# EAGLE board ADC (EAGLE 6.2), part 1 of 2
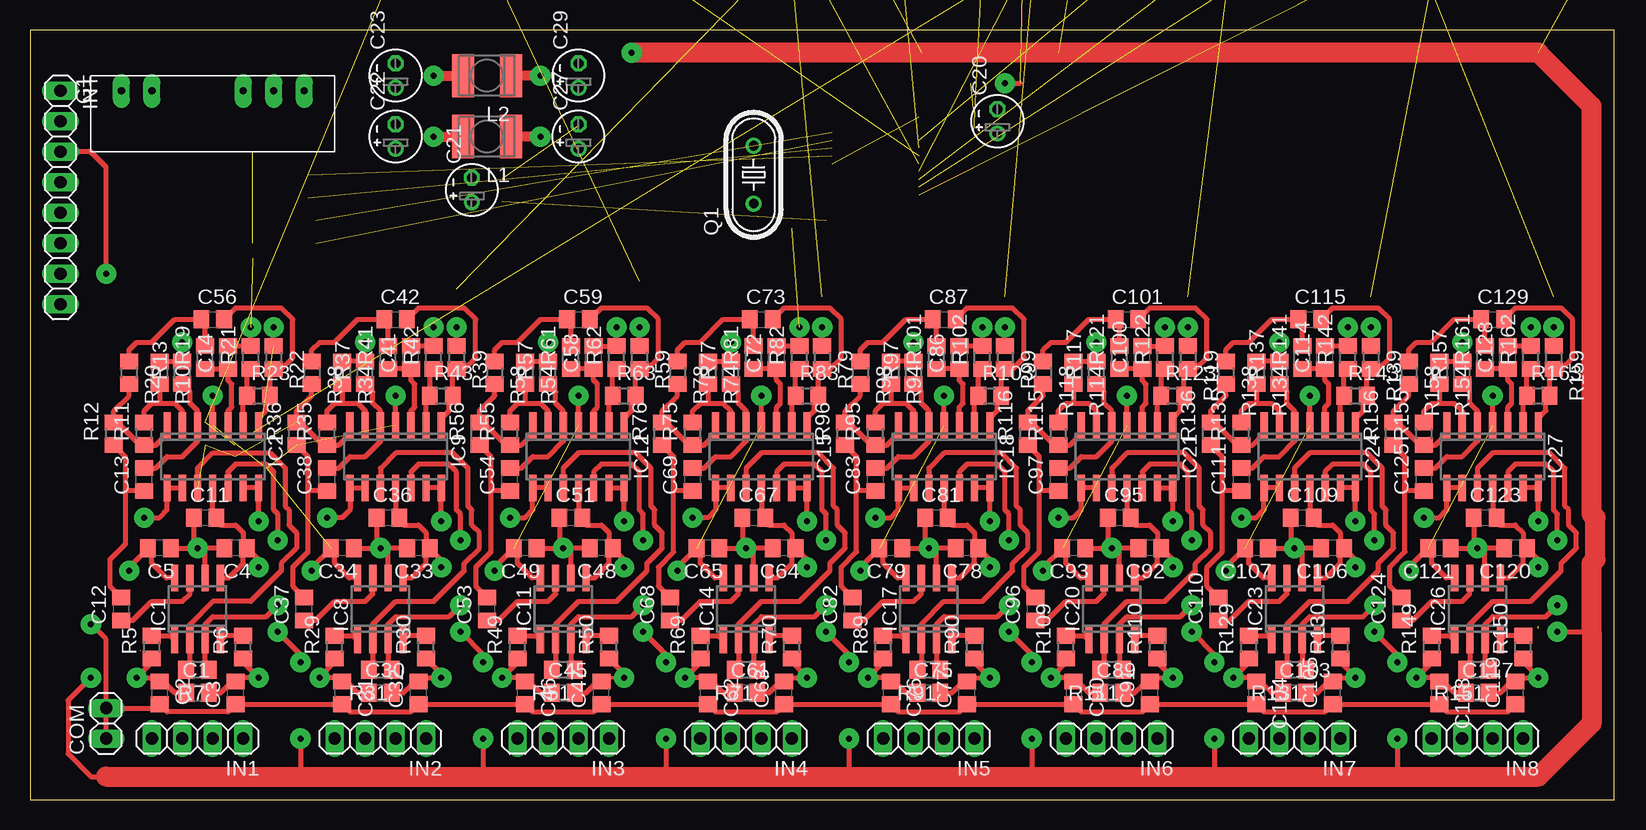
[diagram p0: board, top side]
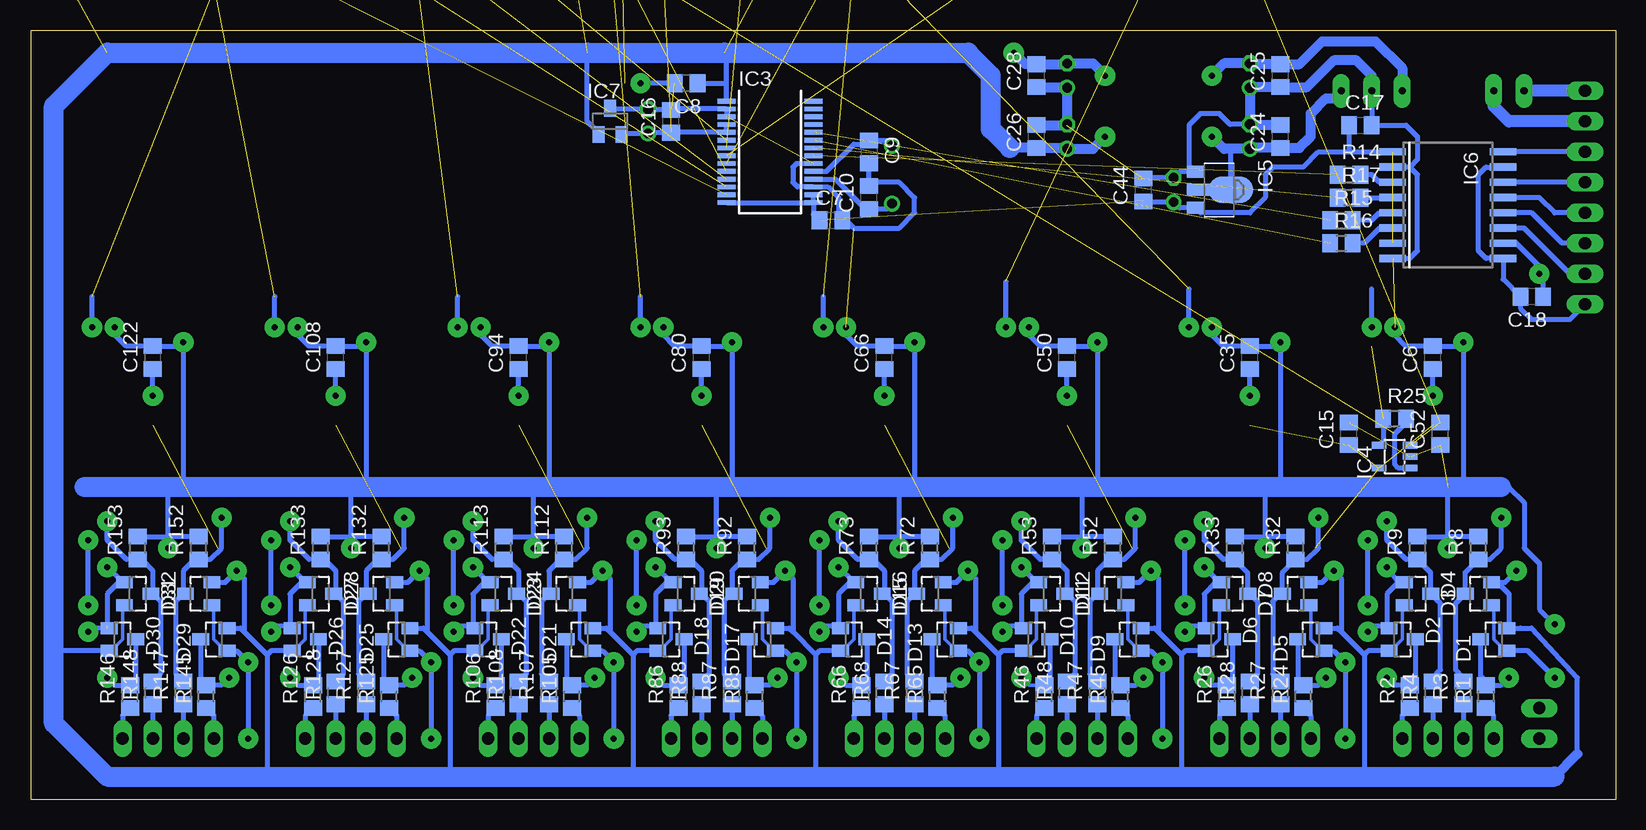
[diagram p1: board, bottom side, seen from below]

Size 132.07 x 64.12 mm. Coordinates in mm from the lower left corner, seen from the top.
Outline: 0,0 132.07,0 132.07,64.12 0,64.12 0,0
Copper layers (1*16): Top 0.035mm / dielectric 1.5mm / Bottom 0.035mm
Design rules: minimum track width 10mil, minimum drill 24mil, track to track 8mil, track to pad 8mil, pad to pad 8mil, via to via 8mil, smd to smd 8mil, copper to edge 40mil, drill to drill 8mil, minimum pad ring 10mil, minimum via ring 8mil, stop-mask expansion 4mil, vias tented up to drill 0mil, thermal gap 10mil

## Footprints (pad centres in the part's own frame; a part is rotated, then mirrored left to right if it is on the bottom)
C0805 = smd 1.3 x 1.5: 1 -0.95,0; 2 0.95,0
E2-4 = drill 0.813 pad 1.27: + -1.016,0 | drill 0.813 pad 1.27 octagon: - 1.016,0
1X02 = drill 1.016 long: 1 -1.27,0; 2 1.27,0
SOT23 = smd 1 x 1.4: 1 -0.95,-1.1; 2 0.95,-1.1; 3 0,1.1
TMV0505D = drill 0.6 pad 1.422 long: 1 0,7.62; 2 0,5.08; 5 0,-2.54; 6 0,-5.08; 7 0,-7.62
SO-08 = smd 0.6 x 2.2: 1 -1.905,-2.6; 2 -0.635,-2.6; 3 0.635,-2.6; 4 1.905,-2.6; 5 1.905,2.6; 6 0.635,2.6; 7 -0.635,2.6; 8 -1.905,2.6
TLC2254ID = smd 0.6 x 2.2: 1 -3.81,-2.6; 2 -2.54,-2.6; 3 -1.27,-2.6; 4 0,-2.6; 5 1.27,-2.6; 6 2.54,-2.6; 7 3.81,-2.6; 8 3.81,2.6; 9 2.54,2.6; 10 1.27,2.6; 11 0,2.6; 12 -1.27,2.6; 13 -2.54,2.6; 14 -3.81,2.6
ADS1256IDBT = smd 0.4 x 1.5: 1 -4.225,-3.625; 2 -3.575,-3.625; 3 -2.925,-3.625; 4 -2.275,-3.625; 5 -1.625,-3.625; 6 -0.975,-3.625; 7 -0.325,-3.625; 8 0.325,-3.625; 9 0.975,-3.625; 10 1.625,-3.625; 11 2.275,-3.625; 12 2.925,-3.625; 13 3.575,-3.625; 14 4.225,-3.625; 15 4.225,3.625; 16 3.575,3.625; 17 2.925,3.625; 18 2.275,3.625; 19 1.625,3.625; 20 0.975,3.625; 21 0.325,3.625; 22 -0.325,3.625; 23 -0.975,3.625; 24 -1.625,3.625; 25 -2.275,3.625; 26 -2.925,3.625; 27 -3.575,3.625; 28 -4.225,3.625
AD8605ARTZ = smd 0.55 x 1.2: 1 -0.95,-1.3; 2 0,-1.3; 3 0.95,-1.3; 4 0.95,1.3; 5 -0.95,1.3
SOT89 = smd 1 x 1.5: 1 -1.499,-1.981; 3 1.499,-1.981 | smd 1 x 2: 2 0,-1.727 | smd 2.2 x 3.7: 2@1 0,0.94
ADUM1402ARWZ = smd 0.6 x 2.2: 1 -4.445,-4.6; 2 -3.175,-4.6; 3 -1.905,-4.6; 4 -0.635,-4.6; 5 0.635,-4.6; 6 1.905,-4.6; 7 3.175,-4.6; 8 4.445,-4.6; 9 4.445,4.6; 10 3.175,4.6; 11 1.905,4.6; 12 0.635,4.6; 13 -0.635,4.6; 14 -1.905,4.6; 15 -3.175,4.6; 16 -4.445,4.6
REF3125AIDBZT = smd 1 x 1.4: 1 -0.95,-1.1; 2 0.95,-1.1; 3 0,1.1
1X04 = drill 1.016 long: 1 -3.81,0; 2 -1.27,0; 3 1.27,0; 4 3.81,0
1X08 = drill 1.016 long: 1 -8.89,0; 2 -6.35,0; 3 -3.81,0; 4 -1.27,0; 5 1.27,0; 6 3.81,0; 7 6.35,0; 8 8.89,0
L4532P = smd 1.8 x 3.6: 1 -2,0; 2 2,0
HC49U-V = drill 0.813: 1 -2.413,0; 2 2.413,0
R0805 = smd 1.3 x 1.5: 1 -0.95,0; 2 0.95,0

## Placement (x,y rotation side)
C1  10pF  [C0805]  13.97,8.89 0 top
C2  100pF  [C0805]  10.79,8.89 270 top
C3  100pF  [C0805]  17.14,8.89 90 top
C4  0.1  [C0805]  17.14,20.95 180 top
C5  0.1  [C0805]  10.79,20.95 180 top
C6  0.1  [C0805]  15.24,36.83 90 bottom
C7  0.1  [C0805]  65.41,48.26 0 bottom
C8  0.1  [C0805]  77.47,59.69 180 bottom
C9  18p  [C0805]  62.23,53.98 270 bottom
C10  18p  [C0805]  62.23,50.16 90 bottom
C11  0.1  [C0805]  14.61,23.5 0 top
C12  1u  [C0805]  7.62,15.88 90 top
C13  1u  [C0805]  9.53,26.67 90 top
C14  47n  [C0805]  16.51,36.83 90 top
C15  0.1  [C0805]  22.23,30.48 90 bottom
C16  0.1  [C0805]  78.74,56.52 90 bottom
C17  0.1  [C0805]  21.27,56.2 0 bottom
C18  0.1  [C0805]  6.99,41.91 180 bottom
C19  0.1  [C0805]  94.61,71.12 90 top  (outside the outline)
C20  47u  [E2-4]  80.64,56.52 90 top
C21  47u  [E2-4]  36.83,50.8 90 top
C22  47u  [E2-4]  30.48,55.24 90 top
C23  47u  [E2-4]  30.48,60.33 90 top
C24  0.1  [C0805]  27.94,55.24 90 bottom
C25  0.1  [C0805]  27.94,60.33 90 bottom
C26  0.1  [C0805]  48.26,55.24 90 bottom
C27  47u  [E2-4]  45.72,55.24 90 top
C28  0.1  [C0805]  48.26,60.33 90 bottom
C29  47u  [E2-4]  45.72,60.33 90 top
C30  10pF  [C0805]  29.21,8.89 0 top
C31  100pF  [C0805]  26.04,8.89 270 top
C32  100pF  [C0805]  32.38,8.89 90 top
C33  0.1  [C0805]  32.38,20.95 180 top
C34  0.1  [C0805]  26.04,20.95 180 top
C35  0.1  [C0805]  30.48,36.83 90 bottom
C36  0.1  [C0805]  29.84,23.5 0 top
C37  1u  [C0805]  22.86,15.88 90 top
C38  1u  [C0805]  24.77,26.67 90 top
C39  0.1  [C0805]  37.47,83.82 0 top  (outside the outline)
C40  0.1  [C0805]  96.52,85.72 270 top  (outside the outline)
C41  47n  [C0805]  31.75,36.83 90 top
C42  33n  [C0805]  30.48,40.01 0 top
C43  0.1  [C0805]  43.18,79.38 0 top  (outside the outline)
C44  0.1  [C0805]  39.37,50.8 90 bottom
C45  10pF  [C0805]  44.45,8.89 0 top
C46  100pF  [C0805]  41.27,8.89 270 top
C47  100pF  [C0805]  47.62,8.89 90 top
C48  0.1  [C0805]  47.62,20.95 180 top
C49  0.1  [C0805]  41.27,20.95 180 top
C50  0.1  [C0805]  45.72,36.83 90 bottom
C51  0.1  [C0805]  45.09,23.5 0 top
C52  0.1  [C0805]  14.61,30.48 90 bottom
C53  1u  [C0805]  38.1,15.88 90 top
C54  1u  [C0805]  40.01,26.67 90 top
C55  0.1  [C0805]  52.7,78.11 0 top  (outside the outline)
C56  33n  [C0805]  15.24,40.01 0 top
C57  0.1  [C0805]  31.75,74.93 0 top  (outside the outline)
C58  47n  [C0805]  46.99,36.83 90 top
C59  33n  [C0805]  45.72,40.01 0 top
C60  0.1  [C0805]  36.83,78.74 0 top  (outside the outline)
C61  10pF  [C0805]  59.69,8.89 0 top
C62  100pF  [C0805]  56.52,8.89 270 top
C63  100pF  [C0805]  62.87,8.89 90 top
C64  0.1  [C0805]  62.87,20.95 180 top
C65  0.1  [C0805]  56.52,20.95 180 top
C66  0.1  [C0805]  60.96,36.83 90 bottom
C67  0.1  [C0805]  60.33,23.5 0 top
C68  1u  [C0805]  53.34,15.88 90 top
C69  1u  [C0805]  55.24,26.67 90 top
C70  0.1  [C0805]  69.85,72.39 0 top  (outside the outline)
C71  0.1  [C0805]  55.24,73.66 0 top  (outside the outline)
C72  47n  [C0805]  62.23,36.83 90 top
C73  33n  [C0805]  60.96,40.01 0 top
C74  0.1  [C0805]  62.23,73.03 0 top  (outside the outline)
C75  10pF  [C0805]  74.93,8.89 0 top
C76  100pF  [C0805]  71.75,8.89 270 top
C77  100pF  [C0805]  78.11,8.89 90 top
C78  0.1  [C0805]  78.11,20.95 180 top
C79  0.1  [C0805]  71.75,20.95 180 top
C80  0.1  [C0805]  76.2,36.83 90 bottom
C81  0.1  [C0805]  75.56,23.5 0 top
C82  1u  [C0805]  68.58,15.88 90 top
C83  1u  [C0805]  70.48,26.67 90 top
C84  0.1  [C0805]  88.27,71.75 0 top  (outside the outline)
C85  0.1  [C0805]  78.74,75.56 0 top  (outside the outline)
C86  47n  [C0805]  77.47,36.83 90 top
C87  33n  [C0805]  76.2,40.01 0 top
C88  0.1  [C0805]  83.82,73.03 0 top  (outside the outline)
C89  10pF  [C0805]  90.17,8.89 0 top
C90  100pF  [C0805]  87,8.89 270 top
C91  100pF  [C0805]  93.34,8.89 90 top
C92  0.1  [C0805]  93.34,20.95 180 top
C93  0.1  [C0805]  87,20.95 180 top
C94  0.1  [C0805]  91.44,36.83 90 bottom
C95  0.1  [C0805]  90.81,23.5 0 top
C96  1u  [C0805]  83.82,15.88 90 top
C97  1u  [C0805]  85.72,26.67 90 top
C98  0.1  [C0805]  106.68,71.75 0 top  (outside the outline)
C99  0.1  [C0805]  111.76,71.75 0 top  (outside the outline)
C100  47n  [C0805]  92.71,36.83 90 top
C101  33n  [C0805]  91.44,40.01 0 top
C102  0.1  [C0805]  105.41,76.2 0 top  (outside the outline)
C103  10pF  [C0805]  105.41,8.89 0 top
C104  100pF  [C0805]  102.23,8.89 270 top
C105  100pF  [C0805]  108.58,8.89 90 top
C106  0.1  [C0805]  108.58,20.95 180 top
C107  0.1  [C0805]  102.23,20.95 180 top
C108  0.1  [C0805]  106.68,36.83 90 bottom
C109  0.1  [C0805]  106.05,23.5 0 top
C110  1u  [C0805]  99.06,15.88 90 top
C111  1u  [C0805]  100.97,26.67 90 top
C112  0.1  [C0805]  99.06,81.28 0 top  (outside the outline)
C113  0.1  [C0805]  111.12,81.92 0 top  (outside the outline)
C114  47n  [C0805]  107.95,36.83 90 top
C115  33n  [C0805]  106.68,40.01 0 top
C116  0.1  [C0805]  116.2,87 0 top  (outside the outline)
C117  10pF  [C0805]  120.65,8.89 0 top
C118  100pF  [C0805]  117.47,8.89 270 top
C119  100pF  [C0805]  123.83,8.89 90 top
C120  0.1  [C0805]  123.83,20.95 180 top
C121  0.1  [C0805]  117.47,20.95 180 top
C122  0.1  [C0805]  121.92,36.83 90 bottom
C123  0.1  [C0805]  121.28,23.5 0 top
C124  1u  [C0805]  114.3,15.88 90 top
C125  1u  [C0805]  116.2,26.67 90 top
C126  0.1  [C0805]  133.35,74.3 0 top  (outside the outline)
C127  0.1  [C0805]  142.24,65.41 0 top  (outside the outline)
C128  47n  [C0805]  123.19,36.83 90 top
C129  33n  [C0805]  121.92,40.01 0 top
C130  0.1  [C0805]  124.46,71.75 0 top  (outside the outline)
COM  COM  [1X02]  6.35,6.35 90 top
D1  BAV199  [SOT23]  10.16,13.34 90 bottom
D2  BAV199  [SOT23]  17.78,13.34 270 bottom
D3  BAV199  [SOT23]  11.43,17.14 90 bottom
D4  BAV199  [SOT23]  16.51,17.14 270 bottom
D5  BAV199  [SOT23]  25.4,13.34 90 bottom
D6  BAV199  [SOT23]  33.02,13.34 270 bottom
D7  BAV199  [SOT23]  26.67,17.14 90 bottom
D8  BAV199  [SOT23]  31.75,17.14 270 bottom
D9  BAV199  [SOT23]  40.64,13.34 90 bottom
D10  BAV199  [SOT23]  48.26,13.34 270 bottom
D11  BAV199  [SOT23]  41.91,17.14 90 bottom
D12  BAV199  [SOT23]  46.99,17.14 270 bottom
D13  BAV199  [SOT23]  55.88,13.34 90 bottom
D14  BAV199  [SOT23]  63.5,13.34 270 bottom
D15  BAV199  [SOT23]  57.15,17.14 90 bottom
D16  BAV199  [SOT23]  62.23,17.14 270 bottom
D17  BAV199  [SOT23]  71.12,13.34 90 bottom
D18  BAV199  [SOT23]  78.74,13.34 270 bottom
D19  BAV199  [SOT23]  72.39,17.14 90 bottom
D20  BAV199  [SOT23]  77.47,17.14 270 bottom
D21  BAV199  [SOT23]  86.36,13.34 90 bottom
D22  BAV199  [SOT23]  93.98,13.34 270 bottom
D23  BAV199  [SOT23]  87.63,17.14 90 bottom
D24  BAV199  [SOT23]  92.71,17.14 270 bottom
D25  BAV199  [SOT23]  101.6,13.34 90 bottom
D26  BAV199  [SOT23]  109.22,13.34 270 bottom
D27  BAV199  [SOT23]  102.87,17.14 90 bottom
D28  BAV199  [SOT23]  107.95,17.14 270 bottom
D29  BAV199  [SOT23]  116.84,13.34 90 bottom
D30  BAV199  [SOT23]  124.46,13.34 270 bottom
D31  BAV199  [SOT23]  118.11,17.14 90 bottom
D32  BAV199  [SOT23]  123.19,17.14 270 bottom
G1  TMV0505D  [TMV0505D]  15.24,59.05 90 top
IC1  AD8221ARZ  [SO-08]  13.97,15.88 0 top
IC2  TLC2254ID  [TLC2254ID]  15.24,28.57 180 top
IC3  ADS1256IDBT  [ADS1256IDBT]  70.48,53.98 270 bottom
IC4  AD8605ARTZ  [AD8605ARTZ]  18.41,28.57 90 bottom
IC5  MCP170333MB  [SOT89]  33.02,50.8 270 bottom
IC6  ADUM1402ARWZ  [ADUM1402ARWZ]  13.97,49.53 270 bottom
IC7  REF3125AIDBZT  [REF3125AIDBZT]  83.82,56.52 0 bottom
IC8  AD8221ARZ  [SO-08]  29.21,15.88 0 top
IC9  TLC2254ID  [TLC2254ID]  30.48,28.57 180 top
IC10  AD8605ARTZ  [AD8605ARTZ]  74.3,81.92 0 top  (outside the outline)
IC11  AD8221ARZ  [SO-08]  44.45,15.88 0 top
IC12  TLC2254ID  [TLC2254ID]  45.72,28.57 180 top
IC13  AD8605ARTZ  [AD8605ARTZ]  32.38,85.09 0 top  (outside the outline)
IC14  AD8221ARZ  [SO-08]  59.69,15.88 0 top
IC15  TLC2254ID  [TLC2254ID]  60.96,28.57 180 top
IC16  AD8605ARTZ  [AD8605ARTZ]  58.42,79.38 0 top  (outside the outline)
IC17  AD8221ARZ  [SO-08]  74.93,15.88 0 top
IC18  TLC2254ID  [TLC2254ID]  76.2,28.57 180 top
IC19  AD8605ARTZ  [AD8605ARTZ]  83.82,80.64 0 top  (outside the outline)
IC20  AD8221ARZ  [SO-08]  90.17,15.88 0 top
IC21  TLC2254ID  [TLC2254ID]  91.44,28.57 180 top
IC22  AD8605ARTZ  [AD8605ARTZ]  99.69,73.03 0 top  (outside the outline)
IC23  AD8221ARZ  [SO-08]  105.41,15.88 0 top
IC24  TLC2254ID  [TLC2254ID]  106.68,28.57 180 top
IC25  AD8605ARTZ  [AD8605ARTZ]  128.27,79.38 0 top  (outside the outline)
IC26  AD8221ARZ  [SO-08]  120.65,15.88 0 top
IC27  TLC2254ID  [TLC2254ID]  121.92,28.57 180 top
IC28  AD8605ARTZ  [AD8605ARTZ]  137.79,71.75 0 top  (outside the outline)
IN1  IN1  [1X04]  13.97,5.08 180 top
IN2  IN2  [1X04]  29.21,5.08 180 top
IN3  IN3  [1X04]  44.45,5.08 180 top
IN4  IN4  [1X04]  59.69,5.08 180 top
IN5  IN5  [1X04]  74.93,5.08 180 top
IN6  IN6  [1X04]  90.17,5.08 180 top
IN7  IN7  [1X04]  105.41,5.08 180 top
IN8  IN8  [1X04]  120.65,5.08 180 top
INT  INT  [1X08]  2.54,50.16 270 top
L1  100uH  [L4532P]  38.1,55.24 180 top
L2  100uH  [L4532P]  38.1,60.33 180 top
Q1  8MHz  [HC49U-V]  60.33,52.07 90 top
R1  2K2  [R0805]  10.79,8.57 90 bottom
R2  2K2  [R0805]  17.14,8.57 90 bottom
R3  100  [R0805]  12.7,8.89 90 bottom
R4  100  [R0805]  15.24,8.89 90 bottom
R5  2K2  [R0805]  10.16,12.7 90 top
R6  2K2  [R0805]  17.78,12.7 90 top
R7  2K  [R0805]  13.97,10.79 180 top
R8  100K  [R0805]  11.43,20.95 90 bottom
R9  100K  [R0805]  16.51,20.95 90 bottom
R10  100K  [R0805]  10.79,35.56 270 top
R11  910K  [R0805]  9.53,30.48 90 top
R12  680K  [R0805]  6.99,30.48 90 top
R13  100K  [R0805]  12.7,35.56 90 top
R14  100  [R0805]  22.23,52.07 0 bottom
R15  100  [R0805]  22.86,48.26 0 bottom
R16  100  [R0805]  22.86,46.35 0 bottom
R17  100  [R0805]  22.23,50.16 0 bottom
R18  100  [R0805]  93.98,77.47 270 top  (outside the outline)
R19  100K  [R0805]  14.61,36.83 90 top
R20  100K  [R0805]  8.26,35.56 270 top
R21  100K  [R0805]  18.41,36.83 90 top
R22  1K  [R0805]  20.32,36.83 270 top
R23  100K  [R0805]  19.05,33.66 0 top
R24  2K2  [R0805]  26.04,8.57 90 bottom
R25  1K  [R0805]  18.41,31.75 0 bottom
R26  2K2  [R0805]  32.38,8.57 90 bottom
R27  100  [R0805]  27.94,8.89 90 bottom
R28  100  [R0805]  30.48,8.89 90 bottom
R29  2K2  [R0805]  25.4,12.7 90 top
R30  2K2  [R0805]  33.02,12.7 90 top
R31  2K  [R0805]  29.21,10.79 180 top
R32  100K  [R0805]  26.67,20.95 90 bottom
R33  100K  [R0805]  31.75,20.95 90 bottom
R34  100K  [R0805]  26.04,35.56 270 top
R35  910K  [R0805]  24.77,30.48 90 top
R36  680K  [R0805]  22.23,30.48 90 top
R37  100K  [R0805]  27.94,35.56 90 top
R38  100K  [R0805]  23.5,35.56 270 top
R39  1K  [R0805]  35.56,36.83 270 top
R40  1K  [R0805]  79.38,86.36 180 top  (outside the outline)
R41  100K  [R0805]  29.84,36.83 90 top
R42  100K  [R0805]  33.66,36.83 90 top
R43  100K  [R0805]  34.29,33.66 0 top
R44  100  [R0805]  73.03,76.2 0 top  (outside the outline)
R45  2K2  [R0805]  41.27,8.57 90 bottom
R46  2K2  [R0805]  47.62,8.57 90 bottom
R47  100  [R0805]  43.18,8.89 90 bottom
R48  100  [R0805]  45.72,8.89 90 bottom
R49  2K2  [R0805]  40.64,12.7 90 top
R50  2K2  [R0805]  48.26,12.7 90 top
R51  2K  [R0805]  44.45,10.79 180 top
R52  100K  [R0805]  41.91,20.95 90 bottom
R53  100K  [R0805]  46.99,20.95 90 bottom
R54  100K  [R0805]  41.27,35.56 270 top
R55  910K  [R0805]  40.01,30.48 90 top
R56  680K  [R0805]  37.47,30.48 90 top
R57  100K  [R0805]  43.18,35.56 90 top
R58  100K  [R0805]  38.73,35.56 270 top
R59  1K  [R0805]  50.8,36.83 270 top
R60  1K  [R0805]  36.83,74.93 0 top  (outside the outline)
R61  100K  [R0805]  45.09,36.83 90 top
R62  100K  [R0805]  48.9,36.83 90 top
R63  100K  [R0805]  49.53,33.66 0 top
R64  100  [R0805]  31.75,79.38 0 top  (outside the outline)
R65  2K2  [R0805]  56.52,8.57 90 bottom
R66  2K2  [R0805]  62.87,8.57 90 bottom
R67  100  [R0805]  58.42,8.89 90 bottom
R68  100  [R0805]  60.96,8.89 90 bottom
R69  2K2  [R0805]  55.88,12.7 90 top
R70  2K2  [R0805]  63.5,12.7 90 top
R71  2K  [R0805]  59.69,10.79 180 top
R72  100K  [R0805]  57.15,20.95 90 bottom
R73  100K  [R0805]  62.23,20.95 90 bottom
R74  100K  [R0805]  56.52,35.56 270 top
R75  910K  [R0805]  55.24,30.48 90 top
R76  680K  [R0805]  52.7,30.48 90 top
R77  100K  [R0805]  58.42,35.56 90 top
R78  100K  [R0805]  53.98,35.56 270 top
R79  1K  [R0805]  66.04,36.83 270 top
R80  1K  [R0805]  63.5,79.38 0 top  (outside the outline)
R81  100K  [R0805]  60.33,36.83 90 top
R82  100K  [R0805]  64.14,36.83 90 top
R83  100K  [R0805]  64.77,33.66 0 top
R84  100  [R0805]  68.58,83.82 0 top  (outside the outline)
R85  2K2  [R0805]  71.75,8.57 90 bottom
R86  2K2  [R0805]  78.11,8.57 90 bottom
R87  100  [R0805]  73.66,8.89 90 bottom
R88  100  [R0805]  76.2,8.89 90 bottom
R89  2K2  [R0805]  71.12,12.7 90 top
R90  2K2  [R0805]  78.74,12.7 90 top
R91  2K  [R0805]  74.93,10.79 180 top
R92  100K  [R0805]  72.39,20.95 90 bottom
R93  100K  [R0805]  77.47,20.95 90 bottom
R94  100K  [R0805]  71.75,35.56 270 top
R95  910K  [R0805]  70.48,30.48 90 top
R96  680K  [R0805]  67.94,30.48 90 top
R97  100K  [R0805]  73.66,35.56 90 top
R98  100K  [R0805]  69.22,35.56 270 top
R99  1K  [R0805]  81.28,36.83 270 top
R100  1K  [R0805]  91.44,81.92 0 top  (outside the outline)
R101  100K  [R0805]  75.56,36.83 90 top
R102  100K  [R0805]  79.38,36.83 90 top
R103  100K  [R0805]  80.01,33.66 0 top
R104  100  [R0805]  88.27,76.83 0 top  (outside the outline)
R105  2K2  [R0805]  87,8.57 90 bottom
R106  2K2  [R0805]  93.34,8.57 90 bottom
R107  100  [R0805]  88.9,8.89 90 bottom
R108  100  [R0805]  91.44,8.89 90 bottom
R109  2K2  [R0805]  86.36,12.7 90 top
R110  2K2  [R0805]  93.98,12.7 90 top
R111  2K  [R0805]  90.17,10.79 180 top
R112  100K  [R0805]  87.63,20.95 90 bottom
R113  100K  [R0805]  92.71,20.95 90 bottom
R114  100K  [R0805]  87,35.56 270 top
R115  910K  [R0805]  85.72,30.48 90 top
R116  680K  [R0805]  83.19,30.48 90 top
R117  100K  [R0805]  88.9,35.56 90 top
R118  100K  [R0805]  84.45,35.56 270 top
R119  1K  [R0805]  96.52,36.83 270 top
R120  1K  [R0805]  110.49,77.47 0 top  (outside the outline)
R121  100K  [R0805]  90.81,36.83 90 top
R122  100K  [R0805]  94.61,36.83 90 top
R123  100K  [R0805]  95.25,33.66 0 top
R124  100  [R0805]  105.41,81.28 0 top  (outside the outline)
R125  2K2  [R0805]  102.23,8.57 90 bottom
R126  2K2  [R0805]  108.58,8.57 90 bottom
R127  100  [R0805]  104.14,8.89 90 bottom
R128  100  [R0805]  106.68,8.89 90 bottom
R129  2K2  [R0805]  101.6,12.7 90 top
R130  2K2  [R0805]  109.22,12.7 90 top
R131  2K  [R0805]  105.41,10.79 180 top
R132  100K  [R0805]  102.87,20.95 90 bottom
R133  100K  [R0805]  107.95,20.95 90 bottom
R134  100K  [R0805]  102.23,35.56 270 top
R135  910K  [R0805]  100.97,30.48 90 top
R136  680K  [R0805]  98.42,30.48 90 top
R137  100K  [R0805]  104.14,35.56 90 top
R138  100K  [R0805]  99.69,35.56 270 top
R139  1K  [R0805]  111.76,36.83 270 top
R140  1K  [R0805]  118.75,73.03 0 top  (outside the outline)
R141  100K  [R0805]  106.05,36.83 90 top
R142  100K  [R0805]  109.86,36.83 90 top
R143  100K  [R0805]  110.49,33.66 0 top
R144  100  [R0805]  119.38,79.38 0 top  (outside the outline)
R145  2K2  [R0805]  117.47,8.57 90 bottom
R146  2K2  [R0805]  123.83,8.57 90 bottom
R147  100  [R0805]  119.38,8.89 90 bottom
R148  100  [R0805]  121.92,8.89 90 bottom
R149  2K2  [R0805]  116.84,12.7 90 top
R150  2K2  [R0805]  124.46,12.7 90 top
R151  2K  [R0805]  120.65,10.79 180 top
R152  100K  [R0805]  118.11,20.95 90 bottom
R153  100K  [R0805]  123.19,20.95 90 bottom
R154  100K  [R0805]  117.47,35.56 270 top
R155  910K  [R0805]  116.2,30.48 90 top
R156  680K  [R0805]  113.67,30.48 90 top
R157  100K  [R0805]  119.38,35.56 90 top
R158  100K  [R0805]  114.94,35.56 270 top
R159  1K  [R0805]  127,36.83 270 top
R160  1K  [R0805]  116.84,69.85 0 top  (outside the outline)
R161  100K  [R0805]  121.28,36.83 90 top
R162  100K  [R0805]  125.09,36.83 90 top
R163  100K  [R0805]  125.73,33.66 0 top
R164  100  [R0805]  111.12,68.58 0 top  (outside the outline)

## Library data of the parts
C1-C130 L1 L2 R1-R164 = rcl
COM IN1-IN8 INT = pinhead
D1-D32 = diode
G1 IC1-IC4 IC6-IC28 = nanoeeg
IC5 = linear
Q1 = crystal; OC_FARNELL: 1666969; OC_NEWARK: unknown

## Nets
+3.3V: C7.1 C17.1 C21.+ C44.1 IC3.14 IC3.15 IC3.16 IC5.3 IC6.1 IC6.7
+5VA: C5.2 C6.1 C8.1 C15.1 C26.1 C27.+ C34.2 C35.1 C39.1 C49.2 C50.1 C55.1 C65.2 C66.1 C70.1 C79.2 C80.1 C84.1 C93.2 C94.1 C98.1 C107.2 C108.1 C112.1 C121.2 C122.1 C126.1 D1.2 D2.2 D3.2 D4.2 D5.2 D6.2 D7.2 D8.2 D9.2 D10.2 D11.2 D12.2 D13.2 D14.2 D15.2 D16.2 D17.2 D18.2 D19.2 D20.2 D21.2 D22.2 D23.2 D24.2 D25.2 D26.2 D27.2 D28.2 D29.2 D30.2 D31.2 D32.2 IC1.8 IC2.4 IC3.1 IC4.5 IC7.1 IC8.8 IC9.4 IC10.5 IC11.8 IC12.4 IC13.5 IC14.8 IC15.4 IC16.5 IC17.8 IC18.4 IC19.5 IC20.8 IC21.4 IC22.5 IC23.8 IC24.4 IC25.5 IC26.8 IC27.4 IC28.5 L1.1
-5VA: C4.1 C11.2 C28.2 C29.- C33.1 C36.2 C48.1 C51.2 C64.1 C67.2 C78.1 C81.2 C92.1 C95.2 C106.1 C109.2 C120.1 C123.2 D1.1 D2.1 D3.1 D4.1 D5.1 D6.1 D7.1 D8.1 D9.1 D10.1 D11.1 D12.1 D13.1 D14.1 D15.1 D16.1 D17.1 D18.1 D19.1 D20.1 D21.1 D22.1 D23.1 D24.1 D25.1 D26.1 D27.1 D28.1 D29.1 D30.1 D31.1 D32.1 IC1.5 IC2.11 IC8.5 IC9.11 IC11.5 IC12.11 IC14.5 IC15.11 IC17.5 IC18.11 IC20.5 IC21.11 IC23.5 IC24.11 IC26.5 IC27.11 L2.1
CH1SW1: IC2.7 R11.1 R12.2 R20.2
CH1SW2: IC9.7 R35.1 R36.2 R38.2
CH1SW3: IC12.7 R55.1 R56.2 R58.2
CH1SW4: IC15.7 R75.1 R76.2 R78.2
CH1SW5: IC18.7 R95.1 R96.2 R98.2
CH1SW6: IC21.7 R115.1 R116.2 R118.2
CH1SW7: IC24.7 R135.1 R136.2 R138.2
CH1SW8: IC27.7 R155.1 R156.2 R158.2
GND: C2.2 C3.1 C4.2 C5.1 C6.2 C7.2 C8.2 C9.2 C10.2 C11.1 C14.2 C15.2 C16.2 C17.2 C19.1 C20.- C21.- C22.- C23.+ C24.2 C25.1 C26.2 C27.- C28.1 C29.+ C31.2 C32.1 C33.2 C34.1 C35.2 C36.1 C39.2 C40.1 C41.2 C43.1 C44.2 C46.2 C47.1 C48.2 C49.1 C50.2 C51.1 C52.1 C55.2 C57.1 C58.2 C60.1 C62.2 C63.1 C64.2 C65.1 C66.2 C67.1 C70.2 C71.1 C72.2 C74.1 C76.2 C77.1 C78.2 C79.1 C80.2 C81.1 C84.2 C85.1 C86.2 C88.1 C90.2 C91.1 C92.2 C93.1 C94.2 C95.1 C98.2 C99.1 C100.2 C102.1 C104.2 C105.1 C106.2 C107.1 C108.2 C109.1 C112.2 C113.1 C114.2 C116.1 C118.2 C119.1 C120.2 C121.1 C122.2 C123.1 C126.2 C127.1 C128.2 C130.1 COM.1 COM.2 G1.6 IC1.6 IC3.2 IC3.3 IC3.17 IC3.20 IC4.2 IC5.1 IC6.2 IC6.8 IC7.3 IC8.6 IC10.2 IC11.6 IC13.2 IC14.6 IC16.2 IC17.6 IC19.2 IC20.6 IC22.2 IC23.6 IC25.2 IC26.6 IC28.2 R8.2 R9.2 R10.1 R13.2 R21.2 R32.2 R33.2 R34.1 R37.2 R42.2 R52.2 R53.2 R54.1 R57.2 R62.2 R72.2 R73.2 R74.1 R77.2 R82.2 R92.2 R93.2 R94.1 R97.2 R102.2 R112.2 R113.2 R114.1 R117.2 R122.2 R132.2 R133.2 R134.1 R137.2 R142.2 R152.2 R153.2 R154.1 R157.2 R162.2
N$1: IN1.3 R3.1
N$2: IN1.2 R4.1
N$3: IN1.4 R1.1
N$4: IN1.1 R2.1
N$5: IC1.1 R5.2
N$6: IC1.4 R6.2
N$7: C1.1 C2.1 D1.3 R1.2 R5.1
N$8: C1.2 C3.2 D2.3 R2.2 R6.1
N$9: IC1.2 IC2.10 R7.2
N$10: IC1.3 IC2.12 R7.1
N$11: IC3.21 R14.1
N$12: C10.1 IC3.18 Q1.1
N$13: C9.1 IC3.19 Q1.2
N$14: IC3.24 R15.1
N$15: C13.2 IC2.5 R13.1
N$16: IC2.6 R10.2 R11.2
N$17: C12.2 C13.1 R12.1
N$18: C12.1 IC1.7
N$19: IC2.2 R21.1 R23.1
N$20: C14.1 IC2.3 R19.1
N$21: IC4.1 R18.2 R25.2
N$22: IC3.23 R16.1
N$23: IC3.22 R17.1
N$26: D4.3 IC2.13 IC2.14 R4.2 R9.1
N$27: D3.3 IC2.8 IC2.9 R3.2 R8.1
N$28: C19.2 IC3.6 R18.1
N$29: C56.1 R19.2 R20.1
N$30: IC4.4 R22.1 R25.1
N$31: IN2.3 R27.1
N$32: IC6.3 R14.2
N$33: IC6.4 R17.2
N$34: IC6.5 R15.2
N$35: IC6.6 R16.2
N$36: G1.1 INT.1
N$37: C18.2 IC6.9 IC6.15 INT.8
N$38: C18.1 IC6.10 IC6.16 INT.3
N$39: C22.+ C24.1 G1.7 IC5.2@1 L1.2
N$40: IC6.11 INT.7
N$41: IC6.12 INT.6
N$42: IC6.13 INT.5
N$43: IC6.14 INT.4
N$44: C23.- C25.2 G1.5 L2.2
N$45: IN2.2 R28.1
N$46: IN2.4 R24.1
N$47: IN2.1 R26.1
N$48: IC8.1 R29.2
N$49: C30.1 C31.1 D5.3 R24.2 R29.1
N$50: C30.2 C32.2 D6.3 R26.2 R30.1
N$51: IC8.2 IC9.10 R31.2
N$52: IC8.3 IC9.12 R31.1
N$53: IC8.4 R30.2
N$54: D8.3 IC9.13 IC9.14 R28.2 R33.1
N$55: D7.3 IC9.8 IC9.9 R27.2 R32.1
N$56: C38.2 IC9.5 R37.1
N$57: IC9.6 R34.2 R35.2
N$58: C37.2 C38.1 R36.1
N$59: C37.1 IC8.7
N$60: C41.1 IC9.3 R41.1
N$61: IC10.4 R39.1 R40.1
N$62: IC10.1 R40.2 R44.2
N$63: C56.2 IC2.1 R22.2 R23.2
N$64: IC9.2 R42.1 R43.1
N$65: C42.1 R38.1 R41.2
N$66: C42.2 IC9.1 R39.2 R43.2
N$67: C43.2 IC3.7 R44.1
N$68: IN3.3 R47.1
N$69: IN3.2 R48.1
N$70: IN3.4 R45.1
N$71: IN3.1 R46.1
N$72: IC11.1 R49.2
N$73: C45.1 C46.1 D9.3 R45.2 R49.1
N$74: C45.2 C47.2 D10.3 R46.2 R50.1
N$75: IC11.2 IC12.10 R51.2
N$76: IC11.3 IC12.12 R51.1
N$77: IC11.4 R50.2
N$78: D12.3 IC12.13 IC12.14 R48.2 R53.1
N$79: D11.3 IC12.8 IC12.9 R47.2 R52.1
N$80: C54.2 IC12.5 R57.1
N$81: IC12.6 R54.2 R55.2
N$82: C53.2 C54.1 R56.1
N$83: C53.1 IC11.7
N$84: C58.1 IC12.3 R61.1
N$85: IC13.4 R59.1 R60.1
N$86: IC13.1 R60.2 R64.2
N$87: IC12.2 R62.1 R63.1
N$88: C59.1 R58.1 R61.2
N$89: C59.2 IC12.1 R59.2 R63.2
N$90: C60.2 IC3.8 R64.1
N$91: C116.2 IC3.12 R144.1
N$92: IN5.3 R87.1
N$93: IN4.3 R67.1
N$94: IN4.2 R68.1
N$95: IN4.4 R65.1
N$96: IN4.1 R66.1
N$97: IC14.1 R69.2
N$98: C61.1 C62.1 D13.3 R65.2 R69.1
N$99: C61.2 C63.2 D14.3 R66.2 R70.1
N$100: IC14.2 IC15.10 R71.2
N$101: IC14.3 IC15.12 R71.1
N$102: IC14.4 R70.2
N$103: D16.3 IC15.13 IC15.14 R68.2 R73.1
N$104: D15.3 IC15.8 IC15.9 R67.2 R72.1
N$105: C69.2 IC15.5 R77.1
N$106: IC15.6 R74.2 R75.2
N$107: C68.2 C69.1 R76.1
N$108: C68.1 IC14.7
N$109: C72.1 IC15.3 R81.1
N$110: IC16.4 R79.1 R80.1
N$111: IC16.1 R80.2 R84.2
N$112: IC15.2 R82.1 R83.1
N$113: C73.1 R78.1 R81.2
N$114: C73.2 IC15.1 R79.2 R83.2
N$115: C74.2 IC3.9 R84.1
N$116: IN5.2 R88.1
N$117: IN5.4 R85.1
N$118: IN5.1 R86.1
N$119: IC17.1 R89.2
N$120: C75.1 C76.1 D17.3 R85.2 R89.1
N$121: C75.2 C77.2 D18.3 R86.2 R90.1
N$122: IC17.2 IC18.10 R91.2
N$123: IC17.3 IC18.12 R91.1
N$124: IC17.4 R90.2
N$125: D20.3 IC18.13 IC18.14 R88.2 R93.1
N$126: D19.3 IC18.8 IC18.9 R87.2 R92.1
N$127: C83.2 IC18.5 R97.1
N$128: IC18.6 R94.2 R95.2
N$129: C82.2 C83.1 R96.1
N$130: C82.1 IC17.7
N$131: C86.1 IC18.3 R101.1
N$132: IC19.4 R99.1 R100.1
N$133: IC19.1 R100.2 R104.2
N$134: IC18.2 R102.1 R103.1
N$135: C87.1 R98.1 R101.2
N$136: C87.2 IC18.1 R99.2 R103.2
N$137: C88.2 IC3.10 R104.1
N$138: IN6.3 R107.1
N$139: IN6.2 R108.1
N$140: IN6.4 R105.1
N$141: IN6.1 R106.1
N$142: IC20.1 R109.2
N$143: C89.1 C90.1 D21.3 R105.2 R109.1
N$144: C89.2 C91.2 D22.3 R106.2 R110.1
N$145: IC20.2 IC21.10 R111.2
N$146: IC20.3 IC21.12 R111.1
N$147: IC20.4 R110.2
N$148: D24.3 IC21.13 IC21.14 R108.2 R113.1
N$149: D23.3 IC21.8 IC21.9 R107.2 R112.1
N$150: C97.2 IC21.5 R117.1
N$151: IC21.6 R114.2 R115.2
N$152: C96.2 C97.1 R116.1
N$153: C96.1 IC20.7
N$154: C100.1 IC21.3 R121.1
N$155: IC22.4 R119.1 R120.1
N$156: IC22.1 R120.2 R124.2
N$157: IC21.2 R122.1 R123.1
N$158: C101.1 R118.1 R121.2
N$159: C101.2 IC21.1 R119.2 R123.2
N$160: C102.2 IC3.11 R124.1
N$161: IN7.3 R127.1
N$162: IN7.2 R128.1
N$163: IN7.4 R125.1
N$164: IN7.1 R126.1
N$165: IC23.1 R129.2
N$166: C103.1 C104.1 D25.3 R125.2 R129.1
N$167: C103.2 C105.2 D26.3 R126.2 R130.1
N$168: IC23.2 IC24.10 R131.2
N$169: IC23.3 IC24.12 R131.1
N$170: IC23.4 R130.2
N$171: D28.3 IC24.13 IC24.14 R128.2 R133.1
N$172: D27.3 IC24.8 IC24.9 R127.2 R132.1
N$173: C111.2 IC24.5 R137.1
N$174: IC24.6 R134.2 R135.2
N$175: C110.2 C111.1 R136.1
N$176: C110.1 IC23.7
N$177: C114.1 IC24.3 R141.1
N$178: IC25.4 R139.1 R140.1
N$179: IC25.1 R140.2 R144.2
N$180: IC24.2 R142.1 R143.1
N$181: C115.1 R138.1 R141.2
N$182: C115.2 IC24.1 R139.2 R143.2
N$184: C130.2 IC3.13 R164.1
N$185: IN8.3 R147.1
N$186: IN8.2 R148.1
N$187: IN8.4 R145.1
N$188: IN8.1 R146.1
N$189: IC26.1 R149.2
N$190: C117.1 C118.1 D29.3 R145.2 R149.1
N$191: C117.2 C119.2 D30.3 R146.2 R150.1
N$192: IC26.2 IC27.10 R151.2
N$193: IC26.3 IC27.12 R151.1
N$194: IC26.4 R150.2
N$195: D32.3 IC27.13 IC27.14 R148.2 R153.1
N$196: D31.3 IC27.8 IC27.9 R147.2 R152.1
N$197: C125.2 IC27.5 R157.1
N$198: IC27.6 R154.2 R155.2
N$199: C124.2 C125.1 R156.1
N$200: C124.1 IC26.7
N$201: C128.1 IC27.3 R161.1
N$202: IC28.4 R159.1 R160.1
N$203: IC28.1 R160.2 R164.2
N$204: IC27.2 R162.1 R163.1
N$205: C129.1 R158.1 R161.2
N$206: C129.2 IC27.1 R159.2 R163.2
N$207: G1.2 INT.2
VREF: C16.1 C20.+ C40.2 C52.2 C57.2 C71.2 C85.2 C99.2 C113.2 C127.2 IC3.4 IC3.5 IC4.3 IC7.2 IC10.3 IC13.3 IC16.3 IC19.3 IC22.3 IC25.3 IC28.3